# EAGLE board hologramassettrackker_WqjWGN3zqZ (EAGLE 7.7.0)
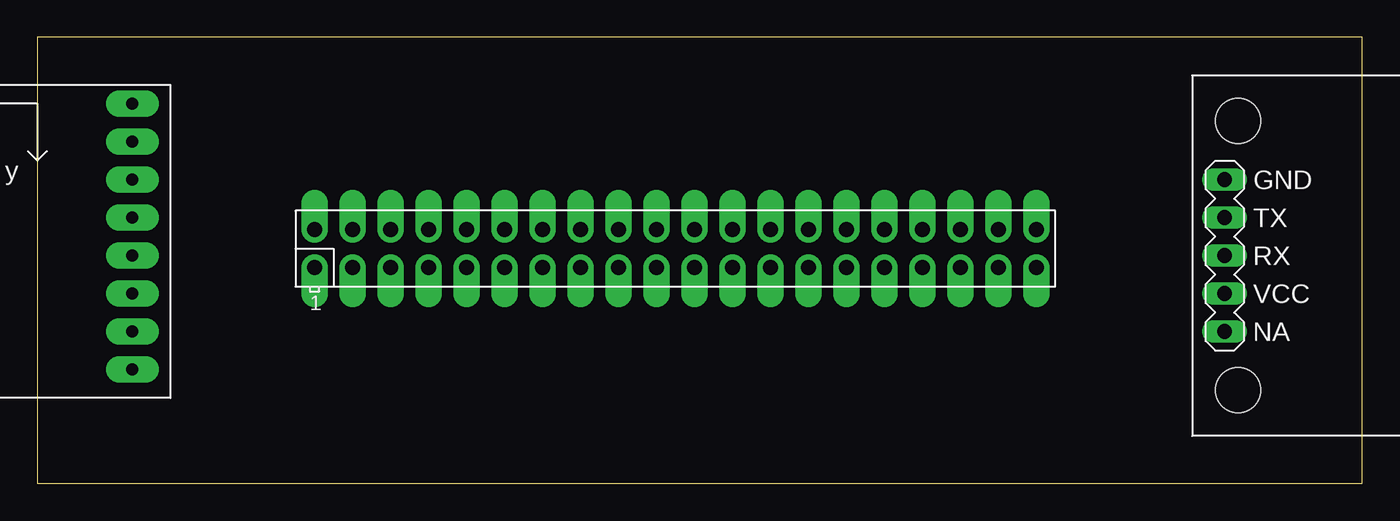
[diagram p0: board, top side]
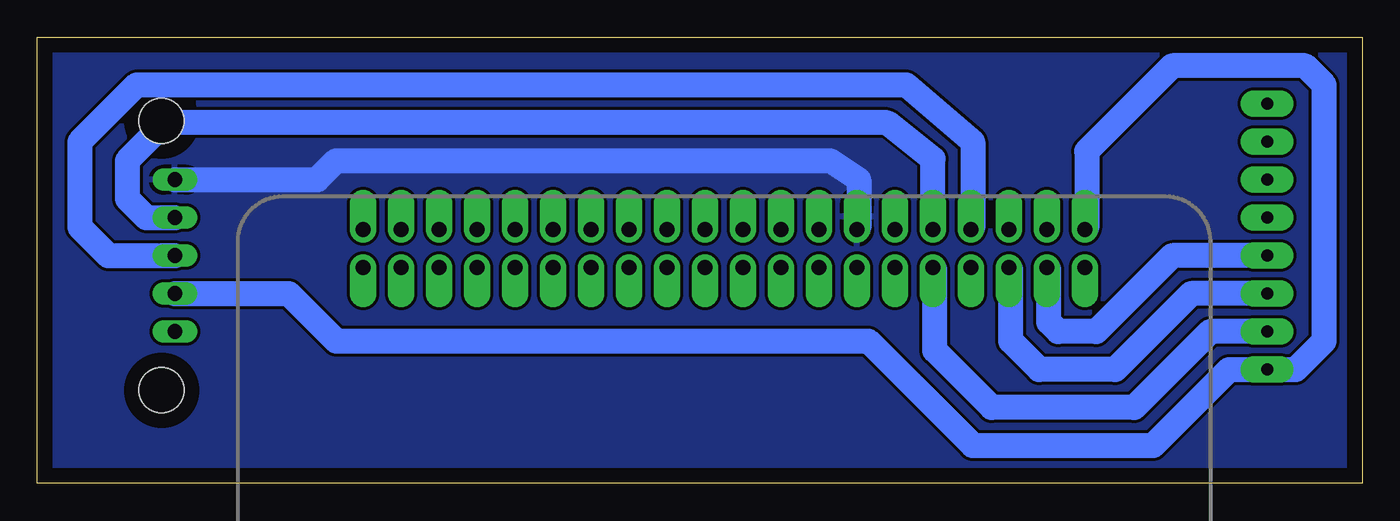
[diagram p1: board, bottom side, seen from below]

Size 88.57 x 29.84 mm. Coordinates in mm from the lower left corner, seen from the top.
Outline: 0,0 88.57,0 88.57,29.84 0,29.84 0,0
Copper layers (1*16): Top 0.035mm / dielectric 1.5mm / Bottom 0.035mm
Design rules "default": minimum track width 10mil, minimum drill 24mil, track to track 8mil, track to pad 8mil, pad to pad 8mil, via to via 8mil, smd to smd 8mil, copper to edge 40mil, drill to drill 8mil, minimum pad ring 10mil, minimum via ring 8mil, stop-mask expansion 4mil, vias tented up to drill 0mil, thermal gap 10mil

## Footprints (pad centres in the part's own frame; a part is rotated, then mirrored left to right if it is on the bottom)
GY-521 = drill 0.8 pad 1.778 long: ADO -8.89,-6.35; GND -8.89,6.35; INT -8.89,-8.89; SCL -8.89,3.81; SDA -8.89,1.27; VCC -8.89,8.89; XCL -8.89,-3.81; XDA -8.89,-1.27
GPS-RECEIVER-NEO6M = drill 1 long: 1 -15.875,5.08; 2 -15.875,2.54; 3 -15.875,0; 4 -15.875,-2.54; 5 -15.875,-5.08 | hole 3: -14.986,9.017; -14.986,-9.017
RASP_PI_ZERO_BOARD_FULL = drill 1 pad 1.778 offset: 1 8.37,25.23; 2 8.37,27.77; 3 10.91,25.23; 4 10.91,27.77; 5 13.45,25.23; 6 13.45,27.77; 7 15.99,25.23; 8 15.99,27.77; 9 18.53,25.23; 10 18.53,27.77; 11 21.07,25.23; 12 21.07,27.77; 13 23.61,25.23; 14 23.61,27.77; 15 26.15,25.23; 16 26.15,27.77; 17 28.69,25.23; 18 28.69,27.77; 19 31.23,25.23; 20 31.23,27.77; 21 33.77,25.23; 22 33.77,27.77; 23 36.31,25.23; 24 36.31,27.77; 25 38.85,25.23; 26 38.85,27.77; 27 41.39,25.23; 28 41.39,27.77; 29 43.93,25.23; 30 43.93,27.77; 31 46.47,25.23; 32 46.47,27.77; 33 49.01,25.23; 34 49.01,27.77; 35 51.55,25.23; 36 51.55,27.77; 37 54.09,25.23; 38 54.09,27.77; 39 56.63,25.23; 40 56.63,27.77

## Placement (x,y rotation side)
U1  GY-521MPU6050  [GY-521]  -2.54,16.51 180 top
U$2  GPS-RECEIVER-NEO6M  [GPS-RECEIVER-NEO6M]  95.25,15.24 0 top
U$3  RPI-ZERO  [RASP_PI_ZERO_BOARD_FULL]  10.16,-10.79 0 top

## Library data of the parts
U1 = gy-521
U$2 = diy-modules
U$3 = rpi-zero

## Nets
5V: U1.VCC U$2.4 U$3.2
GND: U$2.1 U$3.14
GND@1: U1.GND U$3.9
RPI-RX: U$2.2 U$3.10
RPI-TX: U$2.3 U$3.8
SCL: U1.SCL U$3.5
SDA: U1.SDA U$3.3

## Tracks (layer width: path | path; a pad name or v marks a point on that pad's centre or on a via)
5V
  Bottom 1.676: U$3.2 18.41,17.09 18.41,22.23 12.7,27.94 3.81,27.94 2.54,26.67 2.54,9.53 4.45,7.62 U1.VCC 8.89,7.62 13.97,2.54 26.04,2.54 33.02,9.53 68.58,9.53 71.76,12.7 U$2.4
GND
  Bottom 1.676: U$3.14 33.66,17.09 33.66,20.32 35.56,21.59 68.58,21.59 69.85,20.32 U$2.1
  pour Bottom: 0,0 0,30.48 88.9,30.48 88.9,0
GND@1
  Bottom 1.676: U1.GND 10.16,10.16 15.24,5.08 24.77,5.08 28.57,8.89 28.57,14.32 U$3.9
RPI-RX
  Bottom 1.676: U$3.10 28.69,21.7 31.75,24.13 80.01,24.13 82.55,21.59 82.55,19.05 81.28,17.78 U$2.2
RPI-TX
  Bottom 1.676: U$3.8 26.04,17.09 26.04,22.86 30.48,26.67 81.92,26.67 85.73,22.86 85.73,17.15 83.82,15.24 U$2.3
SCL
  Bottom 1.676: U1.SCL 11.43,12.7 16.51,7.62 21.59,7.62 23.5,9.53 23.5,14.32 U$3.5
SDA
  Bottom 1.676: U1.SDA 12.7,15.24 17.78,10.16 20.32,10.16 20.95,10.79 20.95,14.32 U$3.3